# Altium PCB iceWerx_dev_carrier.PcbDoc (part 2 of 2)
Units mil, origin at the board's own origin, x right, y up, seen from the top; angles counter-clockwise.
Board outline 4750 x 3625 mil, 2 copper layers (Top Layer, Bottom Layer); 142 components, 162 nets, 603 pads, 259 vias.
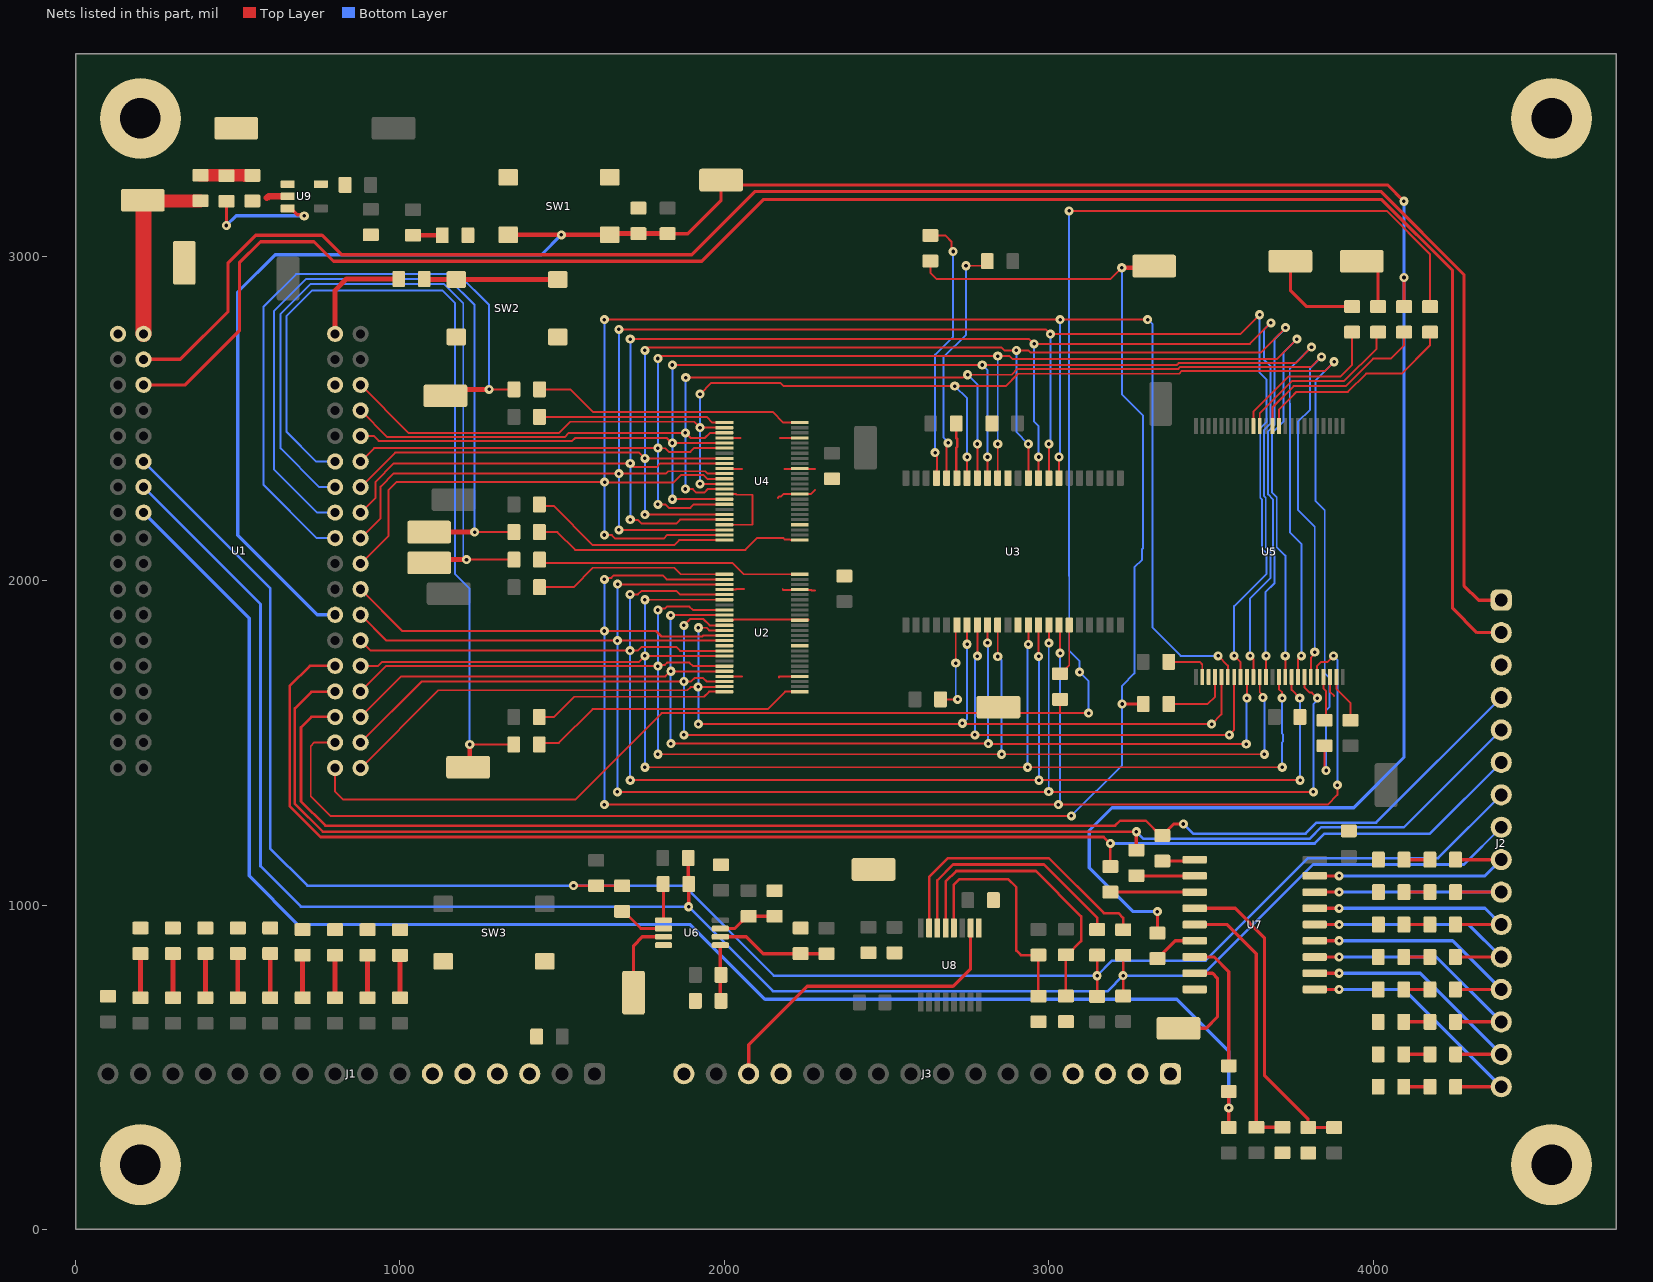
[diagram p2: the nets of this part, all layers, seen from the top]

## Via types
v1: diameter 28, hole 11, Top Layer to Bottom Layer, tented top, 259 vias

## Nets (pads, with @x,y where several pads share a name; then routed paths per layer and width w, separated by ;. In a path a pad name is that pad's centre, name@x,y a point inside that pad or via, vN(x,y) a via of type N, cw(c..) or ccw(c..) an arc to the next point about the centre after c; other vN are vias at no path point) (continued)
GND: C1.1 C2.1 C3.1 C4.1 C5.1 C6.1 C7.1 C8.1 C9.1 C10.1 C11.1 C12.1 C13.1 D1.2 D2.2 D3.2 D4.2 D5.2 D6.2 D7.2 D8.2 D9.2 D10.2 D11.2 D12.2 D13.2 D14.2 D15.2 D16.2 D17.2 D18.2 J1.3 J1.4 J1.5 J1.6 J2.3 J3.1 J3.2 J3.3 J3.4 J3.13 J3.16 pad.MH R41.2 R42.2 R43.2 R61.2 R62.2 R78.2 R79.2 R80.2 SW1.3 SW1.4 SW2.3 SW2.4 SW3.3 SW3.4 TP2.1 TP3.1 U1.PL2_6 U1.PL3_2 U2.4 U2.10 U2.15 U2.21 U2.28 U2.34 U2.39 U2.45 U3.12 U3.34 U4.4 U4.10 U4.15 U4.21 U4.28 U4.34 U4.39 U4.45 U5.27 U5.46 U6.4 U7.9 U8.9 U9.2 | length 1379.5
  Top Layer w6: U2.45@2000,1705.04 2055,1705.04 ; U2.34@2000,1878.27 2027.56,1878.27 2027.56,1880 2259.84,1880 2259.84,1878.27 U2.15@2232.28,1878.27 ; U2.28@2000,1972.76 2036.56,1972.76 2036.56,1975 2060,1975 ; U4.45@2000,2172.52 2087,2172.52 2087,2265 2036.56,2265 2036.56,2267.01 U4.39@2000,2267.01 ; U4.34@2000,2345.75 2027.56,2345.75 2027.56,2345 2055,2345 ; U4.28@2000,2440.24 2050,2440.24 2050,2440 ; 2165,2255 2165,2256.49 2168.51,2260 2175,2260 2182.01,2267.01 U4.10@2232.28,2267.01 2267.01,2267.01 2280,2280 ; 2168.47,1701.09 2168.47,1705.04 U2.4@2232.28,1705.04 ; 2180,1975 2180,1971.01 2268.84,1971.01 2268.84,1970 2280,1970 ; 2185,2345 2280,2345 ; 2185,2440 2172.02,2440 2172.02,2440.24 U4.21@2232.28,2440.24 ; U5.46@3867.01,1703.19 3867.01,1657.99 3880,1645
  Top Layer w20: 590,3180 595,3185 U9.2@653.82,3185
INT: TP21.1 U7.8 | length 330.8
  Top Layer w10: TP21.1@3400,620 3485,620 3520,655 3520,775 3505,790 U7.8@3449.96,790
IO0: U1.PL2_35 U2.36 U2.47 U3.7 U5.29 | length 3654.9
  Top Layer w6: U1.PL2_35@878.74,1422.56 1118.47,1662.29 1886.18,1662.29 1896.13,1672.23 1918.69,1672.23 v1(1919.13,1672.67) 1971.57,1672.67 1972.44,1673.54 U2.47@2000,1673.54 ; v1(1920,1557.82) 2733.88,1557.82 v1(3502.36,1557.82) 3532.36,1587.82 U5.29@3532.36,1703.19 ; v1(1920,1855) 1945.08,1855 1953.31,1846.77 U2.36@2000,1846.77 ; v1(2748.27,1804.21) U3.7@2748.27,1863.62
  Bottom Layer w6: v1(1920,1557.82) v1(1920,1855) ; v1(2733.88,1560.67) 2748.27,1575.06 v1(2748.27,1804.21)
IO1: U1.PL2_33 U2.35 U2.46 U3.8 U5.31 | length 3896.8
  Top Layer w6: U1.PL2_33@878.74,1501.3 1066.73,1689.29 v1(1875,1689.29) 1875.44,1689.73 1898,1689.73 1907.94,1699.67 1935,1699.67 1945.38,1689.29 U2.46@2000,1689.29 ; v1(1875,1525) v1(2772.32,1525) v1(3556.73,1525) 3571.73,1540 U5.31@3571.73,1703.19 ; v1(1875,1862.52) 1894.48,1882 1935.05,1882 1954.53,1862.52 U2.35@2000,1862.52 ; v1@2779.76,1765 v1(2779.76,1767.54) U3.8@2779.76,1863.62
  Bottom Layer w6: v1(1875,1525) v1(1875,1689.29) v1(1875,1862.52) ; v1(2772.32,1525) 2772.32,1759.63 2779.76,1767.07 v1(2779.76,1767.54)
IO2: U1.PL2_31 U2.33 U2.44 U3.9 U5.33 | length 4091
  Top Layer w6: U1.PL2_31@878.74,1580.04 1003.7,1705 1818.26,1705 1834.05,1720.79 v1(1835,1720.79) U2.44@2000,1720.79 ; v1(1834.13,1893.14) 1835,1894.02 U2.33@2000,1894.02 ; v1(1835,1498) v1(2814.18,1498) 2816.18,1496 v1(3609,1496) ; v1(2811.26,1808.63) U3.9@2811.26,1863.62 ; v1(3611.1,1638.19) U5.33@3611.1,1703.19
  Bottom Layer w6: v1(1834.13,1893.14) 1834.56,1892.7 1834.56,1498.44 v1(1835,1498) ; v1(2811.26,1808.63) 2812.72,1807.17 2812.72,1499.46 v1(2814.18,1498) ; v1(3609,1496) 3609,1636.09 v1(3611.1,1638.19)
IO3: U1.PL2_29 U2.32 U2.43 U3.10 U5.35 | length 4343.8
  Top Layer w6: U1.PL2_29@878.74,1658.78 956.5,1736.54 v1(1795,1736.54) 1799.21,1740.74 1816.77,1740.74 1823.82,1747.79 1892.5,1747.79 1903.75,1736.54 U2.43@2000,1736.54 ; v1(1795,1465) v1(2855,1465) v1(3665,1465) ; v1(1795,1909.76) 1799.21,1913.97 1816.77,1913.97 1822.94,1920.14 1892.5,1920.14 1902.88,1909.76 U2.32@2000,1909.76 ; v1@2842.76,1765 v1(2842.76,1766.44) U3.10@2842.76,1863.62 ; U5.35@3650.47,1703.19 3650.47,1655.72 3662.99,1643.2 3660,1640.21 v1(3660,1640)
  Bottom Layer w6: v1(1795,1465) v1(1795,1736.54) v1(1795,1909.76) ; v1(2842.76,1766.44) 2855,1754.19 v1(2855,1465) ; v1(3660,1640) 3661.49,1640 3665,1636.49 v1(3665,1465)
IO4: U1.PL2_27 U2.30 U2.41 U3.13 U5.38 | length 4587.8
  Top Layer w6: U1.PL2_27@881.26,1735 U1.PL2_27@878.74,1737.52 932.52,1737.52 945,1750 1736.97,1750 v1(1755,1768.03) U2.41@2000,1768.03 ; v1(1755,1425) v1(2935,1425) v1(3720,1425) ; v1(1755,1941.26) U2.30@2000,1941.26 ; v1(2937.24,1803.61) U3.13@2937.24,1863.62 ; U5.38@3709.53,1703.19 3709.53,1665.47 3719.53,1655.47 v1(3719.53,1638.19)
  Bottom Layer w6: v1(1755,1425) v1(1755,1768.03) v1(1755,1941.26) ; v1(2935,1425) 2935,1801.36 v1(2937.24,1803.61) ; v1(3719.53,1638.19) 3719.53,1528.66 3722,1526.18 3722,1503.82 3719.53,1501.34 3719.53,1425.47 v1(3720,1425)
IO5: U1.PL2_25 U2.29 U2.40 U3.14 U5.40 | length 4891.1
  Top Layer w6: U1.PL2_25@878.74,1816.26 910.35,1784.65 v1(1709.13,1784.65) 1733.44,1784.65 1743.82,1795.03 1852.5,1795.03 1863.75,1783.78 U2.40@2000,1783.78 ; v1(1709.13,1957.88) 1733.44,1957.88 1743.82,1968.26 1852.5,1968.26 1863.75,1957.01 U2.29@2000,1957.01 ; v1(1710,1385) v1(2970,1385) v1(3775,1385) ; v1@2968.74,1765 U3.14@2968.74,1863.62 ; U5.40@3748.9,1703.19 3748.9,1663.19 v1(3773.9,1638.19)
  Bottom Layer w6: v1(1709.13,1957.88) 1709.56,1957.44 1709.56,1385.44 v1(1710,1385) ; v1(2968.74,1766.59) 2970,1765.33 v1(2970,1385) ; v1(3773.9,1638.19) 3774.45,1637.64 3774.45,1385.55 v1(3775,1385)
IO6: U1.PL2_23 U2.27 U2.38 U3.15 U5.42 | length 5163.4
  Top Layer w6: U1.PL2_23@878.74,1895 958.46,1815.28 v1(1670,1815.28) U2.38@2000,1815.28 ; v1(1670,1349.21) 3000,1349.21 v1(3815.91,1349.21) ; v1(1670.87,1989.38) 1671.75,1988.5 U2.27@2000,1988.5 ; v1(3000.24,1807.68) U3.15@3000.24,1863.62 ; U5.42@3788.27,1703.19 3788.27,1671.73 3805,1655 3811.46,1655 v1(3828.27,1638.19)
  Bottom Layer w6: v1(1670,1349.21) 1670.44,1349.65 1670.44,1988.94 v1(1670.87,1989.38) ; v1(3000,1350) 3000,1807.44 v1(3000.24,1807.68) ; v1(3815.91,1349.21) 3815.91,1619.88 3828.27,1632.24 v1(3828.27,1638.19)
IO7: U1.PL2_21 U2.26 U2.37 U3.16 U5.44 | length 5627.2
  Top Layer w6: U1.PL2_21@878.74,1973.74 1007.48,1845 v1(1630,1845) 1789.25,1845 1806.25,1828 1931.18,1828 1934.21,1831.02 U2.37@2000,1831.02 ; v1(1630,1310) v1(3029.9,1310) 3860,1310 3890,1340 v1(3890,1370) ; v1(1630,2004.25) 1634.21,2008.46 1651.77,2008.46 1659.69,2016.38 1810,2016.38 1822.13,2004.25 U2.26@2000,2004.25 ; v1@3031.73,1765 3035,1768.27 v1(3035,1776.63) 3035,1860.35 U3.16@3031.73,1863.62 ; U5.44@3827.64,1703.19 3827.64,1737.25 3840.39,1750 3859.76,1750 v1(3877.95,1768.19)
  Bottom Layer w6: v1(1630,1310) v1(1630,1845) v1(1630,2004.25) ; v1(3029.9,1310) 3035,1315.1 v1(3035,1776.63) ; v1@3880,1766.14 3890,1756.14 v1(3890,1370)
IO8: U1.PL2_19 U3.29 U4.36 U4.47 U5.30 | length 5803.3
  Top Layer w6: U1.PL2_19@878.74,2052.48 965,2138.74 965,2280 989,2304 v1(1631,2304) 1632,2303 1843.34,2303 1865.84,2325.5 1936.18,2325.5 1947.44,2314.25 U4.36@2000,2314.25 ; v1(1630,2141.02) 1630.44,2140.59 1653,2140.59 1663.82,2129.77 1812.5,2129.77 1823.75,2141.02 U4.47@2000,2141.02 ; v1(1630,2805) v1(3035,2805) v1(3305,2805) ; U3.29@3031.73,2316.38 v1(3031.73,2381.38) ; v1(3522.05,1768.19) 3552.05,1738.19 U5.30@3552.05,1703.19
  Bottom Layer w6: v1(1630,2141.02) 1631,2142.02 v1(1631,2304) 1631,2804 v1(1630,2805) ; v1(3031.73,2381.38) 3035,2384.65 v1(3035,2805) ; v1(3305,2805) 3320,2790 3320,1855 3406.81,1768.19 v1(3522.05,1768.19)
IO9: U1.PL2_17 U3.30 U4.35 U4.46 U5.32 | length 5855.1
  Top Layer w6: U1.PL2_17@878.74,2131.22 940.03,2192.51 940.03,2290.03 981,2331 1674,2331 v1(1675,2330) 1820,2330 1827.5,2337.5 1941.15,2337.5 1948.66,2330 U4.35@2000,2330 ; v1(1675,2156.77) U4.46@2000,2156.77 ; v1(1675,2775) 2990.24,2775 v1(3005.12,2760.12) 3590.12,2760.12 v1(3650,2820) ; U3.30@3000.24,2316.38 v1(3000.24,2421.38) ; v1(3571.42,1768.19) 3591.42,1748.19 U5.32@3591.42,1703.19
  Bottom Layer w6: v1(1675,2156.77) v1(1675,2330) v1(1675,2775) ; v1(3000.24,2421.38) 3005.12,2426.26 v1(3005.12,2760.12) ; v1(3571.42,1768.19) 3571.42,1921.42 3671.96,2021.96 3671.96,2083.95 3656.96,2098.95 3656.96,2250.98 3652,2255.94 3652,2470.19 3672,2490.19 3672,2619.55 3650,2641.55 v1(3650,2820)
IO10: U1.PL2_15 U3.31 U4.33 U4.44 U5.34 | length 5661.9
  Top Layer w6: U1.PL2_15@878.74,2209.96 925,2256.22 925,2305 981.5,2361.5 v1(1710,2361.5) 1721.25,2350.24 1791.74,2350.24 1802.99,2361.5 U4.33@2000,2361.5 ; v1(1710,2188.27) 1710.44,2187.83 1733,2187.83 1743.82,2177.02 1852.5,2177.02 1863.75,2188.27 U4.44@2000,2188.27 ; v1(1710,2745) 2940,2745 v1(2955,2730) 3620,2730 v1(3685,2795) ; U3.31@2968.74,2316.38 v1(2968.74,2381.38) ; v1(3620.79,1768.19) 3630.79,1758.19 U5.34@3630.79,1703.19
  Bottom Layer w6: v1(1710,2188.27) v1(1710,2361.5) v1(1710,2745) ; v1(2955,2730) 2955,2490 2968.74,2476.26 v1(2968.74,2381.38) ; v1(3620.79,1768.19) 3620.79,1945.79 3683.96,2008.96 3683.96,2088.92 3668.96,2103.92 3668.96,2255.95 3664,2260.91 3664,2465.22 3684,2485.22 3684,2661 3663,2682 3663,2773 v1(3685,2795)
IO11: U1.PL2_13 U3.32 U4.32 U4.43 U5.36 | length 5470
  Top Layer w6: U1.PL2_13@878.74,2288.7 985.04,2395 1737.24,2395 v1(1755,2377.24) U4.32@2000,2377.24 ; v1(1755,2204.02) U4.43@2000,2204.02 ; v1(1755,2710) 1764.24,2719.24 2853.94,2719.24 2863.18,2710 v1(2900,2710) 2936.82,2710 2943.82,2703 3653,2703 v1(3730,2780) ; U3.32@2937.24,2316.38 v1(2937.24,2421.38) ; U5.36@3670.16,1703.19 v1(3670.16,1768.19)
  Bottom Layer w6: v1(1755,2204.02) v1(1755,2377.24) v1(1755,2710) ; v1(2900,2710) 2900,2458.62 v1(2937.24,2421.38) ; v1(3670.16,1768.19) 3668,1770.35 3668,1964 3695.96,1991.96 3695.96,2093.89 3691,2098.85 3691,2250.88 3676,2265.88 3676,2460.25 3696,2480.25 3696,2744 3730,2778 v1(3730,2780)
IO12: U1.PL2_11 U3.35 U4.30 U4.41 U5.39 | length 5280.7
  Top Layer w6: U1.PL2_11@878.74,2367.44 920.04,2408.74 v1(1795,2408.74) 1795.44,2408.3 1818,2408.3 1828.82,2397.49 1895,2397.49 1906.25,2408.74 U4.30@2000,2408.74 ; v1(1795,2235.51) 1795.44,2235.08 1818,2235.08 1828.82,2224.26 1895,2224.26 1906.25,2235.51 U4.41@2000,2235.51 ; v1(1795,2685) 1802.24,2692.24 v1(2842.76,2692.24) 2879.57,2692.24 2888.82,2683 3703,2683 v1(3765,2745) ; U3.35@2842.76,2316.38 v1(2842.76,2421.38) ; U5.39@3729.21,1703.19 v1(3729.21,1768.19)
  Bottom Layer w6: v1(1795,2235.51) v1(1795,2408.74) v1(1795,2685) ; v1(2842.76,2421.38) v1(2842.76,2692.24) ; v1(3729.21,1768.19) 3729.21,2077.6 3703,2103.82 3703,2257.5 3688,2272.5 3688,2455.28 3724.27,2491.55 3724.27,2704.27 v1(3765,2745)
IO13: U1.PL2_9 U3.36 U4.29 U4.40 U5.41 | length 5112.9
  Top Layer w6: U1.PL2_9@878.74,2446.18 918.82,2446.18 934,2431 1531,2431 1540,2440 1822.99,2440 1838.5,2424.49 v1(1840,2424.49) U4.29@2000,2424.49 ; v1(1840,2251.26) U4.40@2000,2251.26 ; v1(1840,2665) 1840.24,2665.24 v1@2784.76,2665.24 ; v1@2795.24,2665 3394.69,2665 3400.69,2671 3760.84,2671 v1(3810,2720.16) ; U3.36@2811.26,2316.38 v1(2811.26,2381.38) ; U5.41@3768.58,1703.19 3768.58,1758.19 v1(3778.58,1768.19)
  Bottom Layer w6: v1(1840,2251.26) v1(1840,2424.49) v1(1840,2665) ; v1(2795,2665) 2811.26,2648.73 v1(2811.26,2381.38) ; v1(3778.58,1768.19) 3778.58,2113.23 3744,2147.82 3744,2545.59 3743,2546.59 3743,2653 3810,2720 v1(3810,2720.16)
IO14: U1.PL2_7 U3.37 U4.27 U4.38 U5.43 | length 5007.6
  Top Layer w6: U1.PL2_7@878.74,2524.92 960.66,2443 1508,2443 1520.98,2455.98 v1(1880,2455.98) 1895.98,2440 1940,2440 1955.98,2455.98 U4.27@2000,2455.98 ; v1(1880,2282.76) 1880.44,2282.32 1903,2282.32 1913.82,2271.5 1937.5,2271.5 1948.75,2282.76 U4.38@2000,2282.76 ; v1(1881,2626) 1882,2627 2736.05,2627 2744.05,2635 v1(2750,2635) 2885.27,2635 2903.27,2653 3399.66,2653 3405.66,2659 3809.27,2659 3840.27,2690 v1(3840.86,2690) ; U3.37@2779.76,2316.38 v1(2779.76,2421.38) ; U5.43@3807.95,1703.19 3807.95,1762.95 3820,1775 v1(3820,1780)
  Bottom Layer w6: v1(1880,2282.76) 1880.5,2283.26 1880.5,2625.5 v1(1881,2626) ; v1(2750,2635) 2779.76,2605.24 v1(2779.76,2421.38) ; v1(3820,1780) 3820,2166.82 3768,2218.82 3768,2489.91 3805.86,2527.78 3805.86,2655 v1(3840.86,2690)
IO15: R21.1 U1.PL2_5 U3.38 U4.26 U4.37 | length 5244.6
  Top Layer w6: U1.PL2_5@878.74,2603.66 1027.4,2455 1490,2455 1525,2490 1906.73,2490 v1(1925,2471.73) U4.26@2000,2471.73 ; v1(1925,2298.5) U4.37@2000,2298.5 ; v1(1925,2575) 1960,2610 2172.73,2610 2182.73,2600 v1(2710.18,2600) 2867.24,2600 2905.24,2638 3401.63,2638 3410.63,2647 3852,2647 v1(3880,2675) ; U3.38@2748.27,2316.38 v1(2748.27,2381.38) ; R21.1@3850,1491.26 3850,1420 v1(3855,1415)
  Bottom Layer w6: v1(1925,2298.5) v1(1925,2471.73) v1(1925,2575) ; v1@2709.76,2600.43 v1(2710.18,2600) 2748.27,2561.92 v1(2748.27,2381.38) ; v1(3855,1415) 3855,1600 3865,1610 3865,1701.12 3850.95,1715.17 3850.95,2217.67 3823,2245.63 3823,2618 v1(3880,2675)
IOEXP0: J2.16 R45.2 U7.10 | length 839.9
  Top Layer w10: U7.10@3820.04,740 v1(3895.04,740) ; R45.2@4254.37,440 J2.16@4395,440
  Bottom Layer w10: v1(3895.04,740) 4095,740 J2.16@4395,440
IOEXP1: J2.15 R47.2 U7.11 | length 819.1
  Top Layer w10: U7.11@3820.04,790 v1(3895.04,790) ; R47.2@4254.37,540 J2.15@4395,540
  Bottom Layer w10: v1(3895.04,790) 4145,790 J2.15@4395,540
IOEXP2: J2.14 R49.2 U7.12 | length 799.1
  Top Layer w10: U7.12@3820.04,840 v1(3895.04,840) ; R49.2@4253.74,640 J2.14@4395,640
  Bottom Layer w10: v1(3895.04,840) 4195,840 J2.14@4395,640
IOEXP3: J2.13 R51.2 U7.13 | length 778.4
  Top Layer w10: U7.13@3820.04,890 v1(3895.04,890) ; R51.2@4253.74,740 J2.13@4395,740
  Bottom Layer w10: v1(3895.04,890) 4245,890 J2.13@4395,740
IOEXP4: J2.12 R60.2 U7.14 | length 757.6
  Top Layer w10: U7.14@3820.04,940 v1(3895.04,940) ; R60.2@4253.74,840 J2.12@4395,840
  Bottom Layer w10: v1(3895.04,940) 4295,940 J2.12@4395,840
IOEXP5: J2.11 R65.2 U7.15 | length 736.9
  Top Layer w10: U7.15@3820.04,990 v1(3895.04,990) ; R65.2@4253.74,940 J2.11@4395,940
  Bottom Layer w10: v1(3895.04,990) 4345,990 J2.11@4395,940
IOEXP6: J2.10 R67.2 U7.16 | length 716.2
  Top Layer w10: U7.16@3820.04,1040 v1(3895.04,1040) ; R67.2@4253.74,1040 J2.10@4395,1040
  Bottom Layer w10: v1(3895.04,1040) J2.10@4395,1040
IOEXP7: J2.9 R69.2 U7.17 | length 736.9
  Top Layer w10: U7.17@3820.04,1090 v1(3895.04,1090) ; R69.2@4253.74,1140 J2.9@4395,1140
  Bottom Layer w10: v1(3895.04,1090) 4345,1090 J2.9@4395,1140
IOEXP_CSn: R55.2 R58.2 U1.PL3_15 | length 4784.7
  Top Layer w10: R55.2@3555,314.37 v1(3555,375) R58.2@3555,425.63
  Bottom Layer w10: U1.PL3_15@209.45,2209.96 535,1884.41 535,1090 685,940 1895,940 2125,710 3395,710 3555,550 v1(3555,375)
MCU_RESETn: R27.2 SW2.1 SW2.2 | length 411.5
  Top Layer w15: R27.2@1074.99,2928.58 SW2.1@1173.5,2928.58 SW2.2@1486.5,2928.58
MISO: J2.5 R56.2 U1.PL2_30 | length 4398.4
  Top Layer w8: U1.PL2_30@800,1658.78 798.45,1657.23 727.23,1657.23 676.1,1606.1 676.1,1312.17 762.17,1226.1 v1(3270,1226.1)
  Top Layer w10: R56.2@3270,1169.37 v1(3270,1226.1)
  Bottom Layer w8: v1(3270,1226.1) 3291.1,1205 3805,1205 3840,1240 4095,1240 J2.5@4395,1540
MOSI: J2.6 R57.2 U1.PL2_28 | length 4493.6
  Top Layer w8: U1.PL2_28@800,1737.52 722.52,1737.52 660,1675 660,1305.5 755.5,1210 3169.49,1210 v1@3189.49,1190 ; v1@3188.99,1190 v1@3189.49,1190 ; R57.2@3190,1118.74 v1(3190,1190) v1@3189.49,1190
  Bottom Layer w8: v1(3190,1190) 3820,1190 3850,1220 4175,1220 J2.6@4395,1440
NetC3_2: C3.2 R22.2 R83.2 TP1.1 U9.1 | length 160.3
  Top Layer w40: R22.2@385,3250 519.76,3250 520.08,3249.69 544.69,3249.69 C3.2@545,3249.37
NetD1_1: D1.1 R44.1 | length 130.6
  Top Layer w15: R44.1@1000,714.37 D1.1@1000,845
NetD2_1: D2.1 R45.1 | length 81.3
  Top Layer w10: D2.1@4094.37,440 R45.1@4175.63,440
NetD3_1: D3.1 R46.1 | length 131.3
  Top Layer w15: R46.1@900,714.37 D3.1@900,845.63
NetD4_1: D4.1 R47.1 | length 81.3
  Top Layer w10: D4.1@4094.37,540 R47.1@4175.63,540
NetD5_1: D5.1 R48.1 | length 131.3
  Top Layer w15: R48.1@800,714.37 D5.1@800,845.63
NetD6_1: D6.1 R49.1 | length 80.6
  Top Layer w10: D6.1@4094.37,640 R49.1@4175,640
NetD7_1: D7.1 R50.1 | length 131.3
  Top Layer w15: R50.1@700,714.37 D7.1@700,845.63
NetD8_1: D8.1 R51.1 | length 80.6
  Top Layer w10: D8.1@4094.37,740 R51.1@4175,740
NetD9_1: D9.1 R59.1 | length 136.3
  Top Layer w15: R59.1@600,714.37 D9.1@600,850.63
NetD10_1: D10.1 R60.1 | length 80.6
  Top Layer w10: D10.1@4094.37,840 R60.1@4175,840
NetD11_1: D11.1 R64.1 | length 136.3
  Top Layer w15: R64.1@500,714.37 D11.1@500,850.63
NetD12_1: D12.1 R65.1 | length 80
  Top Layer w10: D12.1@4095,940 R65.1@4175,940
NetD13_1: D13.1 R66.1 | length 136.3
  Top Layer w15: R66.1@400,714.37 D13.1@400,850.63
NetD14_1: D14.1 R67.1 | length 80
  Top Layer w10: D14.1@4095,1040 R67.1@4175,1040
NetD15_1: D15.1 R68.1 | length 136.3
  Top Layer w15: R68.1@300,714.37 D15.1@300,850.63
NetD16_1: D16.1 R69.1 | length 80
  Top Layer w10: D16.1@4095,1140 R69.1@4175,1140
NetD17_1: D17.1 R70.1 | length 136.3
  Top Layer w15: R70.1@200,714.37 D17.1@200,850.63
NetD18_1: D18.1 R1.1 | length 90.5
  Top Layer w15: R1.1@1040.13,3065 D18.1@1130.63,3065
NetR3_2: R3.2 U2.1 | length 873.2
  Top Layer w6: R3.2@1429.37,1495 1429.37,1499.92 1489.92,1499.92 1593.84,1603.84 2133.63,1603.84 2187.58,1657.8 U2.1@2232.28,1657.8
NetR4_1: R4.1 U3.39 | length 171.8
  Top Layer w8: R4.1@2715,2485 2715,2439.6 2718,2436.6 2718,2413.4 2715,2410.4 2715,2318.15 U3.39@2716.77,2316.38
NetR5_1: R5.1 U3.41 | length 829.1
  Top Layer w6: R5.1@2635,3064.37 2680.63,3064.37 2700.79,3044.21 2700.79,3019.21 v1(2705,3015) ; v1(2650,2395) 2655,2390 2655,2341.22 2653.78,2340 U3.41@2653.78,2316.38
  Bottom Layer w6: v1(2650,2395) 2650,2697.23 2705,2752.23 v1(2705,3015)
NetR6_1: R6.1 U3.40 | length 756.3
  Top Layer w6: v1@2685,2420 2685.28,2419.72 U3.40@2685.28,2316.38 ; v1(2745,2970.95) 2796.58,2970.95 R6.1@2810.63,2985
  Bottom Layer w6: v1(2690,2425) 2690,2427.53 2675,2442.53 2675,2688.39 2745,2758.39 v1(2745,2970.95)
NetR7_1: R7.1 U3.17 | length 163
  Top Layer w6: R7.1@3035,1712.91 3036.06,1712.91 3063.23,1740.09 U3.17@3063.23,1863.62
NetR8_1: R8.1 U3.6 | length 286.1
  Top Layer w6: R8.1@2666.36,1634.17 v1(2719.17,1634.17) ; v1(2713.39,1745.89) 2713.39,1860.24 U3.6@2716.77,1863.62
  Bottom Layer w6: v1(2713.39,1745.89) 2713.39,1639.96 v1(2719.17,1634.17)
NetR9_2: R9.2 U2.48 | length 602.9
  Top Layer w6: R9.2@1429.37,1580 1475,1580 1537.26,1642.26 1937.26,1642.26 1952.8,1657.8 U2.48@2000,1657.8
NetR10_2: R10.2 U2.24 | length 820.9
  Top Layer w6: R10.2@1430,2065 1440,2055 2024.18,2055 2059.18,2020 U2.24@2232.28,2020
NetR13_2: R13.2 U2.25 | length 603.1
  Top Layer w6: R13.2@1430,1980 1535,1980 1595,2040 1845,2040 1865,2020 U2.25@2000,2020
NetR16_2: R16.2 U4.1 | length 843.2
  Top Layer w6: R16.2@1430,2150 1485,2150 1540,2095 2065,2095 2102,2132 2181.18,2132 2186.16,2127.02 2202.98,2127.02 2204.72,2125.28 U4.1@2232.28,2125.28
NetR17_2: R17.2 U4.48 | length 630.7
  Top Layer w6: R17.2@1430,2235 1430,2230.59 1474.41,2230.59 1595,2110 1845,2110 1860.28,2125.28 U4.48@2000,2125.28
NetR18_2: R18.2 U4.24 | length 844.7
  Top Layer w6: R18.2@1430,2590 1525,2590 1594.8,2520.2 2148.88,2520.2 2181.6,2487.48 U4.24@2232.28,2487.48
NetR21_2: R21.2 U5.45 | length 138.7
  Top Layer w6: U5.45@3847.32,1703.19 3847.32,1667.3 3855,1659.63 3855,1649.64 3855.27,1649.37 3855.27,1627.01 3855,1626.74 3855,1575 R21.2@3850,1570
NetR23_1: R23.1 U5.26 | length 145.3
  Top Layer w6: R23.1@3370,1750 3465,1750 3473.31,1741.69 U5.26@3473.31,1703.19
NetR24_2: R24.2 U4.25 | length 577.3
  Top Layer w6: R24.2@1430,2505 1945,2505 1962.52,2487.48 U4.25@2000,2487.48
NetR25_1: R25.1 U5.28 | length 212.6
  Top Layer w6: R25.1@3370,1620 3490,1620 3512.68,1642.68 U5.28@3512.68,1703.19
NetR27_1: R27.1 U1.PL2_2 | length 344.6
  Top Layer w15: U1.PL2_2@800,2761.14 800,2895 835,2930 R27.1@996.25,2930
NetR28_1: R28.1 U5.11 | length 639.6
  Top Layer w6: U5.11@3709.53,2476.81 3709.53,2527.37 3748,2565.84 3748,2566.18 3763.82,2582 3922,2582 3978.52,2638.52 4088.52,2638.52 4175.39,2725.39 R28.1@4175.39,2766.34
NetR29_1: R29.1 U5.12 | length 583.5
  Top Layer w6: U5.12@3689.84,2476.81 3689.84,2534.84 3755,2600 3915,2600 4000,2685 4055,2685 4095.39,2725.39 R29.1@4095.39,2766.34
NetR30_2: R30.2 U5.15 | length 509.4
  Top Layer w6: U5.15@3630.79,2476.81 3630.79,2520.79 3740,2630 3900,2630 3935.39,2665.39 R30.2@3935.39,2766.34
NetR31_1: R31.1 U5.47 | length 151.1
  Top Layer w6: U5.47@3886.69,1703.19 3886.69,1667.05 3930,1623.74 R31.1@3930,1570
NetR32_1: R32.1 U5.14 | length 537.6
  Top Layer w6: U5.14@3650.47,2476.81 3650.47,2516.04 3749.43,2615 3910,2615 4010.47,2715.47 4010.47,2766.34 R32.1@4015.39,2766.34
NetR34_2: R34.2 R41.1 U6.5 | length 174.1
  Top Layer w10: R41.1@1987.6,705 R41.1@1987.6,706.77 ; U6.5@1987.6,876.61 R41.1@1987.6,706.77 ; R41.1@1989.37,705 R41.1@1987.6,706.77
NetR35_2: R35.2 R42.1 U6.6 | length 349
  Top Layer w10: U6.6@1987.6,902.2 2067.8,902.2 2120,850 R35.2@2315,850
NetR36_2: R36.2 R43.1 U6.7 | length 183.1
  Top Layer w10: U6.7@1987.6,927.8 2032.24,927.8 2070.08,965.63 R36.2@2075,965.63 R43.1@2155,965.63
NetR39_1: R39.1 U6.1 | length 112.1
  Top Layer w10: R39.1@1811.26,1065 1812.4,1063.86 U6.1@1812.4,953.39
NetR40_1: R40.1 U6.2 | length 149.3
  Top Layer w8: R40.1@1685,980.63 1689.92,980.63 1742.76,927.8 U6.2@1812.4,927.8
NetR52_1: R52.1 U7.1 | length 101.8
  Top Layer w10: R52.1@3350,1135.63 3445.59,1135.63 U7.1@3449.96,1140
NetR53_2: R53.2 R61.1 U7.4 | length 974.4
  Top Layer w10: U7.4@3449.96,990 3575,990 3665,900 3665,475 3799.02,340.98 3799.02,314.37 R61.1@3800,314.37 R53.2@3880,314.37
NetR54_2: R54.2 R62.1 U7.5 | length 842.3
  Top Layer w10: U7.5@3449.96,940 3550,940 3640,850 R54.2@3640,315 R62.1@3720,315
NetR56_1: R56.1 U7.2 | length 180
  Top Layer w10: R56.1@3270,1090 U7.2@3449.96,1090
NetR57_1: R57.1 U7.3 | length 260
  Top Layer w10: R57.1@3190,1040 U7.3@3449.96,1040
NetR58_1: R58.1 U7.7 | length 414.3
  Top Layer w10: U7.7@3449.96,840 3510,840 3555,795 R58.1@3555,504.37
NetR63_1: R63.1 U7.6 | length 137.7
  Top Layer w10: R63.1@3335,835 3390,890 U7.6@3449.96,890
NetR74_2: R74.2 R78.1 U8.12 | length 739.1
  Top Layer w8: U8.12@2707.8,929.17 2707.8,1062.8 2725,1080 2875,1080 2900,1055 2900,860 2914.06,845.94 R74.2@2968.06,845.94 R78.1@2968.06,719.06
NetR75_2: R75.2 R79.1 U8.13 | length 900
  Top Layer w8: U8.13@2682.2,929.17 2682.2,1072.2 2715,1105 2960,1105 3100,965 3100,888.59 3057.98,846.57 R75.2@3053.06,846.57 R79.1@3053.06,719.69
NetR76_1: R76.1 U8.15 | length 892.6
  Top Layer w8: U8.15@2631.02,929.17 2631.02,1086.02 2690,1145 3000.05,1145 3170.05,975 3215,975 3229.52,960.48 R76.1@3229.52,924.06
NetR77_1: R77.1 U8.14 | length 764.1
  Top Layer w8: U8.14@2656.61,929.17 2656.61,1076.61 2705,1125 2985,1125 3148.98,961.02 R77.1@3148.98,924.69
NetR82_1: R82.1 U9.5
NetR83_1: R83.1 U9.3 | length 388
  Top Layer w10: v1(465,3095) R83.1@465,3170 ; U9.3@653.82,3147.6 663.66,3147.6 682.86,3128.4 701.56,3128.4 v1(705,3124.96)
  Bottom Layer w10: v1(465,3095) 494.96,3124.96 v1(705,3124.96)
O\E\_BYTE0: R3.1 TP10.1 U1.PL2_12 | length 2699.4
  Top Layer w6: v1(1215,1495) R3.1@1350.63,1495
  Top Layer w15: TP10.1@1210,1425 1215,1430 v1(1215,1495)
  Bottom Layer w6: U1.PL2_12@800,2367.44 742.56,2367.44 650,2460 650,2815 730,2895 1130,2895 1170,2855 1170,2020 1215,1975 v1(1215,1495)
O\E\_BYTE1: R16.1 TP15.1 U1.PL2_16 | length 2385.8
  Top Layer w6: v1(1230,2150) R16.1@1351.26,2150
  Top Layer w15: TP15.1@1090,2150 v1(1230,2150)
  Bottom Layer w6: U1.PL2_16@800,2209.96 745.04,2209.96 611.11,2343.89 611.11,2831.11 710,2930 1150,2930 1230,2850 v1(1230,2150)
O\E\_BYTE2: R10.1 TP14.1 U1.PL2_14 | length 2317.1
  Top Layer w6: v1(1205,2065) R10.1@1351.26,2065
  Top Layer w15: TP14.1@1090,2055 1100,2065 v1(1205,2065)
  Bottom Layer w6: U1.PL2_14@800,2288.7 751.3,2288.7 632.32,2407.68 632.32,2822.32 725,2915 1135,2915 1195,2855 1195,2075 v1(1205,2065)
O\E\_BYTE3: R18.1 TP17.1 U1.PL2_18 | length 2093.7
  Top Layer w6: v1(1275,2590) R18.1@1351.26,2590
  Top Layer w15: TP17.1@1140,2570 1160,2590 v1(1275,2590)
  Bottom Layer w6: U1.PL2_18@800,2131.22 743.78,2131.22 579.29,2295.71 579.29,2844.29 680,2945 1180,2945 1275,2850 v1(1275,2590)
OE#: R5.2 R25.2 TP19.1 U1.PL2_34 | length 5229.2
  Top Layer w6: U1.PL2_34@800,1501.3 736.3,1501.3 725,1490 725,1335 785,1275 v1(3070,1275) ; R5.2@2635,2985.63 2635,2950 2655,2930 3190.29,2930 v1(3225.14,2964.86)
  Top Layer w8: v1(3225.98,1620) R25.2@3291.26,1620
  Top Layer w15: v1(3225.14,2964.86) 3319.86,2964.86 TP19.1@3325,2970
  Bottom Layer w6: v1(3070,1275) 3225.98,1430.98 v1(3225.98,1620) 3225.98,1675.98 3264.02,1714.02 3264.02,2041.02 3288,2065 3288,2097.58 3291.02,2100.6 3291.02,2508.98 3225.29,2574.71 3225.29,2964.71 v1(3225.14,2964.86) v1@3225,2965
OS: TP9.1 U6.3 | length 248.7
  Top Layer w10: TP9.1@1720,730 1720,875 1747.2,902.2 U6.3@1812.4,902.2
REF: J3.14 U8.10 | length 996.1
  Top Layer w10: J3.14@2075,480 2075,570 2255,750 2705,750 2758.98,803.98 U8.10@2758.98,929.17
RESETn: C12.2 R29.2 R33.1 R63.2 SW1.1 SW1.2 TP23.1 U1.PL2_24 | length 8378.6
  Top Layer w10: R33.1@1829.92,3070 1887.01,3070 1990,3172.99 TP23.1@1990,3235 ; TP23.1@2037.01,3220 4045,3220 v1(4095.1,3169.9) ; R63.2@3335,913.74 v1(3335,980) ; R29.2@4095.39,2845.08 v1@4095.39,2934.61
  Top Layer w15: SW1.2@1333.5,3066.42 v1(1497.74,3066.42) SW1.1@1646.5,3066.42 1650.08,3070 C12.2@1735,3070 R33.1@1825,3070 R33.1@1829.92,3070
  Bottom Layer w10: U1.PL2_24@800,1895 745,1895 500,2140 500,2890 615,3005 1436.32,3005 v1(1497.74,3066.42) ; v1(3335,980) 3260,980 3125,1115 3125,1230 3195,1300 3940,1300 4095.2,1455.2 v1(4095.2,2934.8) v1@4095.2,3169.8
RY/BY#: R30.1 TP6.1 | length 301.1
  Top Layer w10: TP6.1@3745,2985 3745,2895 3794.92,2845.08 R30.1@3935.39,2845.08
SCK: J2.4 R52.2 U1.PL2_32 | length 4303.7
  Top Layer w6: U1.PL2_32@800,1580.04 U1.PL2_32@800,1580.04
  Top Layer w8: U1.PL2_32@800,1580.04 726.94,1580.04 695,1548.1 695,1320 770,1245 3205,1245 3220,1260 3299.45,1260 3345.08,1214.37 R52.2@3350,1214.37
  Top Layer w10: R52.2@3350,1214.37 3385.63,1250 v1(3415,1250)
  Bottom Layer w8: v1(3415,1250) 3445,1220 3792.2,1220 3826.2,1254 4009,1254 J2.4@4395,1640
SCL: J2.7 R38.2 R40.2 R73.2 R77.2 U1.PL3_11 | length 5820.8
  Top Layer w8: v1(1535,1060) 1579.76,1060 1580.39,1059.37 R38.2@1605,1059.37 R40.2@1685,1059.37 ; R73.2@3148.98,718.43 v1(3148.98,782.19) R77.2@3148.98,845.94
  Bottom Layer w8: U1.PL3_11@209.45,2367.44 600,1976.89 600,1175 715,1060 v1(1535,1060) 1875,1060 2152.81,782.19 v1(3148.98,782.19) 3195.71,828.91 3483.91,828.91 3800,1145 4200,1145 J2.7@4395,1340
SDA: J2.8 R37.2 R39.2 R72.2 R76.2 U1.PL3_13 | length 5787.8
  Top Layer w8: R72.2@3229.52,719.68 v1(3229.52,782.5) R76.2@3229.52,845.31
  Top Layer w10: R37.2@1888.74,1145 1888.74,1090.87 1890,1089.61 R39.2@1890,1065 v1(1890,995)
  Bottom Layer w8: U1.PL3_13@209.45,2288.7 570,1928.15 570,1120 695,995 v1(1890,995) 2150,735 3182.02,735 v1(3229.52,782.5) 3472.5,782.5 3815,1125 4280,1125 J2.8@4395,1240
UART_RX: J2.1 U1.PL3_3 | length 5621.2
  Top Layer w10: U1.PL3_3@209.45,2682.4 322.4,2682.4 470,2830 470,2980 555,3065 760,3065 820,3005 1900,3005 2095,3200 4023.99,3200 4280,2943.99 4280,1985 4325,1940 J2.1@4395,1940
UART_TX: J2.2 U1.PL3_5 | length 5757.9
  Top Layer w10: U1.PL3_5@209.45,2603.66 338.66,2603.66 505,2770 505,2980 570,3045 735,3045 795,2985 1930,2985 2120,3175 4026.36,3175 4245,2956.36 4245,1915 4320,1840 J2.2@4395,1840
V5: R22.1 TP5.1 U1.PL3_1 | length 594.1
  Top Layer w40: TP5.1@205,3175 TP5.1@209.45,3170.55 ; TP5.1@207.22,3172.78 208.74,3171.26 R22.1@385,3171.26
  Top Layer w50: U1.PL3_1@209.45,2761.14 TP5.1@209.45,3170.55
WE#: R7.2 R28.2 TP20.1 U1.PL2_36 | length 5460.8
  Top Layer w6: U1.PL2_36@800,1422.56 800,1350 825,1325 1540,1325 1806.84,1591.84 3035,1591.84 ; R7.2@3035,1634.17 3035,1591.84 ; v1(3063,3139.96) 4041.6,3139.96 4175.39,3006.17 R28.2@4175.39,2845.08 ; v1@3123,1592 v1(3123,1591.84) 3035,1591.84
  Bottom Layer w6: v1(3063,3139.96) 3063,2015 3063.23,2014.77 3063.23,1783.59 3095,1751.82 v1(3095,1718.05) 3123,1690.05 v1(3123,1591.84)
WP#: R32.2 TP8.1 | length 172.8
  Top Layer w10: TP8.1@3965,2985 3985.51,2985 4015.39,2955.11 R32.2@4015.39,2845.08
pads on no net: U1.PL2_1 U1.PL2_3 U1.PL2_8 U1.PL2_10 U1.PL2_26 U1.PL3_4 U1.PL3_6 U1.PL3_7 U1.PL3_8 U1.PL3_9 U1.PL3_10 U1.PL3_12 U1.PL3_14 U1.PL3_16 U1.PL3_18 U1.PL3_20 U1.PL3_22 U1.PL3_24 U1.PL3_26 U1.PL3_28 U1.PL3_30 U1.PL3_32 U1.PL3_34 U1.PL3_36 U3.28 U5.9 U5.10 U5.13 U9.4

## Polygon pours and split planes (outlines as drawn)
GND on Top Layer "Top Layer-GND" (solid, remove dead copper, pour order 6): 0,0 0,3625 4750,3625 4750,0
3V3 on Top Layer "Top Layer-3V3" (solid, pour order 4): 870,3465 870,3120 1085,3120 1085,3465
NetR82_1 on Top Layer "Top Layer-NetR82_1" (solid, pour order 2): 730,3315 730,3165 860,3165 860,3315
NetC3_2 on Top Layer "Top Layer-NetC3_2" (solid, pour order 0): 710,3203.61 330,3203.61 330,3465 710,3465
3V3 on Bottom Layer "Bottom Layer-3V3" (solid, remove dead copper, pour order 8): 4750,0 4750,3625 0,3625 0,0

## Silkscreen, mask and mechanical layers (free items; w line width, h text height)
Top Overlay:
  lines w6: 1010,1695 1010,1765 ; 1030,2690 1100,2690 ; 1045,1365 1125,1365 ; 4060,1470 4060,1595
  text "5V_IN" at 400,3525 h40
  text "3.3V" at 915,3455 h40
  text "https://github.com/HomebrewSiliconClub" at 1155,3450 h200
  text "FPGA RESET" at 1285,3300 h40
  text "5V" at 170,3230 h40
  text "WP#" at 3910,3110 h40
  text "OE#" at 3264.15,3095 h40
  text "RESETn" at 1885,3090 h40
  text "GND" at 280,2925 h40 r90
  text "USB" at 425,2835 h50
  text "MCU RESET" at 1545,2735 h40
  text "OE_BYTE3" at 1030,2635 h40
  text "A29" at 2488.36,2510 h40 r90
  text "A30" at 3220,2505 h40 r90
  text "ALE0" at 1100.19,2361.5 h40
  text "OE_BYTE1" at 1050,2210 h40 r90
  text "UART_RX" at 4460,1920 h40
  text "ICEWERX" at 530,1910 h80 r90
  text "UART_TX" at 4460,1820 h40
  text "ALE1" at 1085,1805 h40
  text "GND" at 4460,1720 h40
  text "OE_BYTE2" at 1060,1695 h40 r90
  text "ALE0" at 1150,1630 h40
  text "SCK" at 4460,1620 h40
  text "MISO" at 4460,1520 h40
  text "WE#" at 2795,1510 h40
  text "BHE" at 4110,1480 h40 r90
  text "MOSI" at 4460,1420 h40
  text "SPI_GPIO_I2C" at 4220,1345 h80 r90
  text "OE_BYTE0" at 1050,1315 h40
  text "SCL" at 4460,1315 h40
  text "SDA" at 4460,1225 h40
  text "GND" at 2405,1175 h40
  text "IOEXP7" at 4460,1120 h40
  text "GPIO9" at 1190,1060 h40
  text "IOEXP6" at 4460,1025 h40
  text "IOEXP5" at 4460,925 h40
  text "IOEXP4" at 4460,825 h40
  text "IOEXP3" at 4460,725 h40
  text "OS" at 1605,705 h40 r90
  text "IOEXP2" at 4460,625 h40
  text "INT" at 3510,580 h40
  text "IOEXP1" at 4460,520 h40
  text "IOEXP0" at 4460,420 h40
  text "A1" at 2390,356.57 h40 r90
  text "GPIO8" at 85,355 h40
  text "A0" at 2290,343.25 h40 r90
  text "A2" at 2485,343.25 h40 r90
  text "A3" at 2595,343.25 h40 r90
  text "A4" at 2695,343.25 h40 r90
  text "A5" at 2790,343.25 h40 r90
  text "A6" at 2895,343.25 h40 r90
  text "A7" at 3000,343.25 h40 r90
  text "GND" at 1115,305 h40 r90
  text "GND" at 1220,305 h40 r90
  text "GND" at 1320,305 h40 r90
  text "GND" at 1420,305 h40 r90
  text "GND" at 1890,303.26 h40 r90
  text "COM" at 1990,303.26 h40 r90
  text "GND" at 2195,303.26 h40 r90
  text "GND" at 3095,303.26 h40 r90
  text "GND" at 3195,303.26 h40 r90
  text "GND" at 3300,303.26 h40 r90
  text "GND" at 3400,303.26 h40 r90
  text "3.3V" at 1525,271.68 h40 r90
  text "3.3V" at 1625,271.68 h40 r90
  text "GPIO1" at 935,245.02 h40 r90
  text "GPIO9" at 65,240 h40 r90
  text "GPIO7" at 380,231.69 h40 r90
  text "GPIO6" at 440,231.69 h40 r90
  text "GPIO5" at 525,231.69 h40 r90
  text "GPIO4" at 625,231.69 h40 r90
  text "GPIO3" at 725,231.69 h40 r90
  text "GPIO2" at 825,231.69 h40 r90
  text "GPIO0" at 1020,231.69 h40 r90
  text "FPGA_GPIO" at 735,105 h80
  text "ANALOG_IN" at 2505,100 h80
  text "REFIN/OUT" at 2095,70 h40 r90
Board:
  the board outline again, w5

## Text inside footprints (layer, text, board x,y; h text height)
J1: Top Overlay "1" at 1690,455 h40; Top Overlay "16" at 65,540 h40
J2: Top Overlay "1" at 4410,2035 h40 r90; Top Overlay "16" at 4465,295 h40 r90
J3: Top Overlay "1" at 3455,470 h40; Top Overlay "16" at 1835,545 h40
U1: Top Overlay "1" at 937.8,2770.98 h40 r270; Top Overlay "PL2" at 888.58,2879.25 h40 r180; Top Overlay "2" at 701.57,2780.83 h40 r270; Top Overlay "35" at 937.8,1452.09 h40 r270; Top Overlay "36" at 701.57,1452.09 h40 r270; Top Overlay "1" at 278.35,2770.98 h40 r270; Top Overlay "PL3" at 217.32,2875.32 h40 r180; Top Overlay "2" at 32.28,2780.83 h40 r270; Top Overlay "35" at 268.5,1452.09 h40 r270; Top Overlay "36" at 32.28,1452.09 h40 r270